# Altium PCB 6_Channels_RX_V1_PCB.PcbDoc
Units mm, origin at the board's own origin, x right, y up, seen from the top; angles counter-clockwise.
Board outline 70 x 50 mm, 2 copper layers (Top Layer, Bottom Layer); 23 components, 20 nets, 102 pads, 14 vias.
Unrouted connection lines stored in the file: 2.
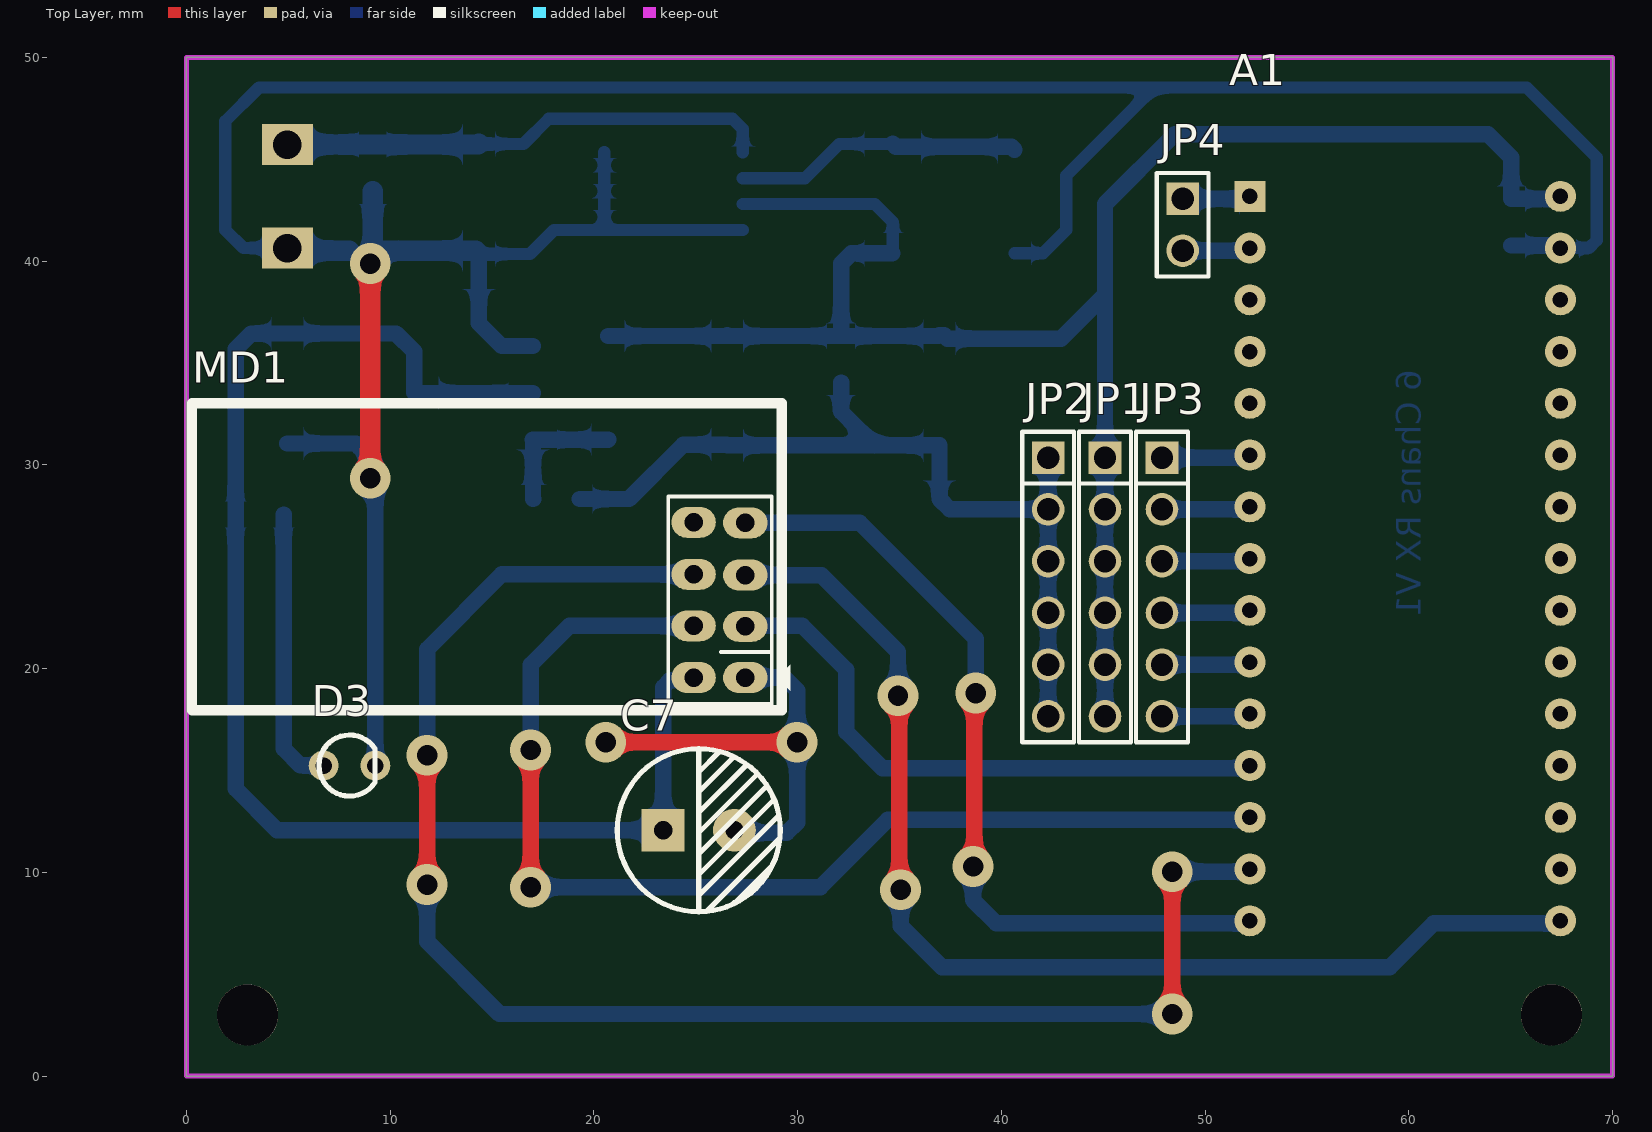
[diagram p0: Top Layer view]
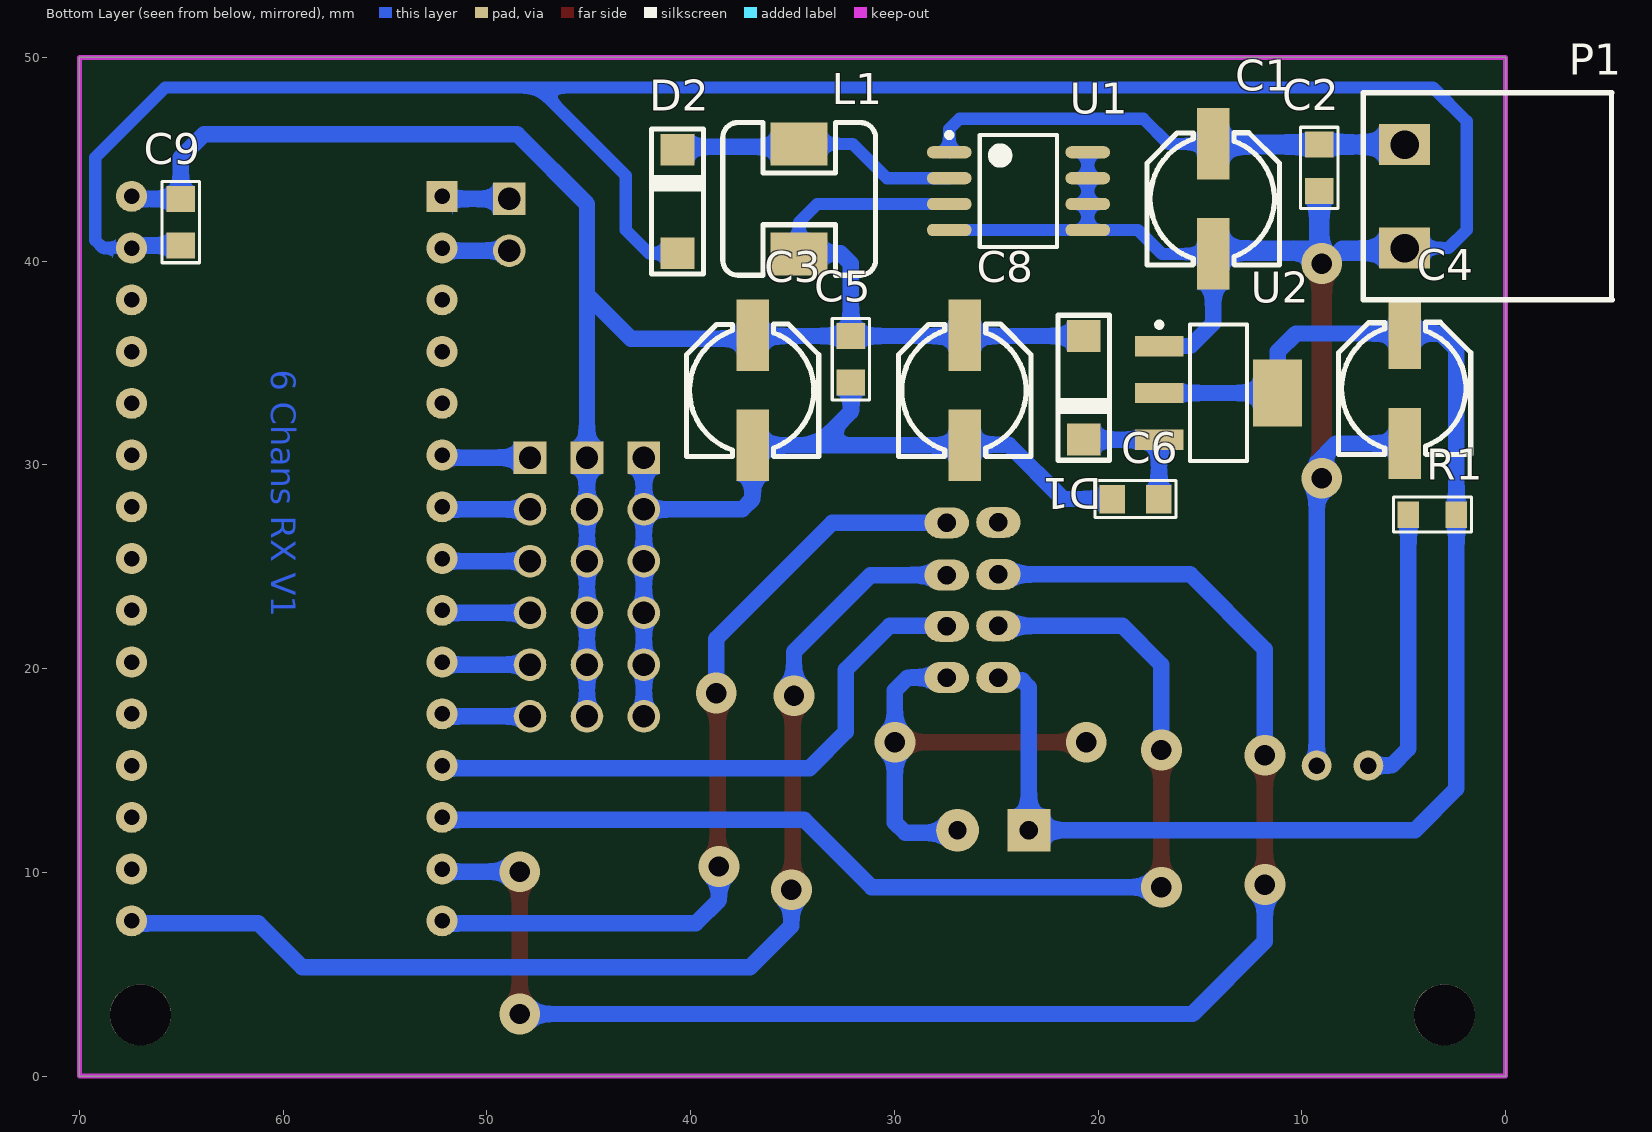
[diagram p1: Bottom Layer view, seen from below]

## Layer stack, top to bottom
Top Solder: solder mask 0.0102, Solder Resist, Dk 3.5
Top Layer: signal copper 0.0356
Dielectric 1: dielectric 0.32, FR-4, Dk 4.8
Bottom Layer: signal copper 0.0356
Bottom Solder: solder mask 0.0102, Solder Resist, Dk 3.5

## Board outline
0,0 70,0 70,50 0,50

## Design rules (kind name [scope] priority, off if disabled: settings)
Clearance [All] p1: gap=1 ignorepadtopadclearanceinfootprint=FALSE
PolygonConnect [All] p1: connectstyle=Relief reliefconductorwidth=0.254 reliefentries=4 polygonreliefangle="90 Angle" airgapwidth=0.254
RoutingVias [All] p1: holewidth=1 width=2 viastyle="Through Hole" minholewidth=1 minwidth=2 maxholewidth=1 maxwidth=2
SolderMaskExpansion [All] p1: expansion=0.102 istentingtop=FALSE
Width [All] p1: maxlimit=1 minlimit=0.6 preferedwidth=0.8
30 further rules are at their usual default settings.

## Components (designator, comment, footprint, x,y, rotation, side; value= is the part's Value field where it differs from the comment)
A1 "Nano" "Arduino nano" 50.673,47.244 r270 top
C1 "100uF/ 35V" "CAP SMD ALUMINUM D8" 14.351,43.053 r0 bottom
C2 "104" SM-0805 9.144,44.577 r90 bottom
C3 "16V/ 220uF" "CAP SMD ALUMINUM D8" 36.957,33.655 r0 bottom
C4 "16V/ 220uF" "CAP SMD ALUMINUM D8" 4.953,33.749 r0 bottom
C5 "104" SM-0805 32.131,35.179 r90 bottom
C6 "104" SM-0805 18.161,28.321 r180 bottom
C7 "10uF" "tu hoa 8mm" 25.146,12.065 r0 top
C8 "16V/ 220uF" "CAP SMD ALUMINUM D8" 26.543,33.655 r0 bottom
C9 "104" SM-0805 65.024,41.91 r90 bottom
D1 "M7" DO-214AC 20.701,33.782 r270 bottom
D2 "SS210" DO-214AC 40.64,42.926 r90 bottom
D3 "LED" "LED-3MM GRE" 8.001,15.24 r0 top value="LED 3 ly Single Colour"
JP1 "JP 1x6 2.54" "JP 1x6 DT" 45.085,30.353 r270 top
JP2 "JP 1x6 2.54" "JP 1x6 DT" 42.291,30.353 r270 top
JP3 "JP 1x6 2.54" "JP 1x6 DT" 47.879,30.353 r270 top
JP4 "JP 1x2 2.54" "JP 1x2 DT" 48.895,43.053 r270 top
L1 "100uH" "INDUCTOR SMD 7342 7.3X7.3X4.2mm" 34.671,43.053 r270 bottom value="150 mH"
MD1 "NRF24L01 Module" NRF24L01 27.432,19.558 r90 top
P1 "CON 2 EDG5.08" "CON 2 2EDG5.08" 4.953,45.72 r270 bottom
R1 "1k" "RESISTOR SMD 0805" 3.59,27.559 r0 bottom
U1 "XL1509" SOP8 23.905,43.434 r180 bottom
U2 "LM1117-3.3V" SOT223-4N 14.097,33.528 r180 bottom

## Footprints (in the part's own frame and the unit in brackets; to place one, negate y for a bottom-side part, rotate by r counter-clockwise, add the part's x,y. Pads: shape width x height; smd on the part's side, far side on the other; paste and mask are expansions set on the pad)
"Arduino nano" [mil] "arduino nano"
  rect 60x60 hole 30: 0(160,60)
  round 60 hole 30: 1(260,60) 2(360,60) 3(460,60) 4(560,60) 5(660,60) 6(760,60) 7(860,60) 8(960,60) 9(1060,60) 10(1160,60) 11(1260,60) 12(1360,60) 13(1460,60) 14(1560,60) 15(1560,660) 16(1460,660) 17(1360,660) 18(1260,660) 19(1160,660) 20(1060,660) 21(960,660) 22(860,660) 23(760,660) 24(660,660) 25(560,660) 26(460,660) 27(360,660) 28(260,660) 29(160,660)
  body extent -25,10 1715,710, height 507
"CAP SMD ALUMINUM D8" [mm] "SMT Aluminum Electrolytic Capacitors, Dimensions 6.3x7.7(DxL)"
  rect 1.6x3.5 smd: 1(0,-2.7) 2(0,2.7)
  silkscreen extent -3.25,-3.25 3.25,3.25, body extent -3.34,-3.52 3.26,3.48, height 7.7
"CON 2 2EDG5.08" [mm]
  rect 2x2.5 hole 1.4: 1(0,0) 2(5.08,0)
  silkscreen extent -2.54,-2.03 7.62,10.21, body extent -2.5,-1.75 7.58,10.25, height 3.15
DO-214AC [mm]
  rect 1.55x1.65 smd: 1(-2.54,0) 2(2.54,0)
  silkscreen extent -3.56,-1.27 3.56,1.27, body extent -2.59,-1.29 2.61,1.31, height 2.4
"INDUCTOR SMD 7342 7.3X7.3X4.2mm" [mm] "Inductor 7342 Body 7.3x7.3X4.2mm, Pad 2.8x2.1mm"
  rect 2.1x2.8 smd: 1(-2.7,0) 2(2.7,0)
  silkscreen extent -3.75,-3.75 3.75,3.75, body extent -3.65,-3.65 3.65,3.65, height 4.8
"JP 1x2 DT" [mm] "2 pins, 1 row, straight, gold plating"
  rect 1.6x1.6 hole 1.1: 1(0,0)
  round 1.6 hole 1.1: 2(2.54,0)
  silkscreen extent -1.27,-1.27 3.81,1.27, body extent -1.27,-1.27 3.81,1.27, height 8.54
"JP 1x6 DT" [mm] "6 pins, 1 row, straight, gold plating"
  rect 1.6x1.6 hole 1.1: 1(0,0)
  round 1.6 hole 1.1: 2(2.54,0) 3(5.08,0) 4(7.62,0) 5(10.16,0) 6(12.7,0)
  silkscreen extent -1.27,-1.27 13.97,1.27, body extent -1.27,-1.27 13.97,1.27, height 8.54
"LED-3MM GRE" [mm]
  round 1.47 hole 0.813: 1(-1.27,0) 2(1.27,0)
  silkscreen extent -1.5,-1.5 1.25,1.5, body extent -1.73,-1.65 1.49,1.65, height 4.72
NRF24L01 [mil]
  oval 60x86 hole 36: 1(0,0) 2(0,100) 3(99,0) 4(100,100) 5(198,0) 6(199.5,100) 7(299,0) 8(300,100)
  silkscreen extent -63,-86 530,1069, body extent -73,-74 518,1068, height 588
"RESISTOR SMD 0805" [mm]
  rect 1.05x1.3 smd: 1(-1.177,0) 2(1.177,0)
  Top Layer pour cut-out: -0.584,0.864 0.584,0.864 0.584,-0.864 -0.584,-0.864
  silkscreen extent -1.92,-0.86 1.92,0.86, body extent -1,-0.62 1,0.63, height 0.5
SM-0805 [mil] "Compoment SMD 80x50mil"
  rect 50x55 smd: 1(-45,0) 2(45,0)
  Top Layer pour cut-out: -18,36 18,36 18,-36 -18,-36
  silkscreen extent -78,-36 78,36, body extent -40,-25 40,25, height 24
SOP8 [mm] "8-Pin Small Outline Package 1.27 mm Pitch, IPC Medium Density"
  oval 2.2x0.6 smd: 1(-3.4,1.905) 2(-3.4,0.635) 3(-3.4,-0.635) 4(-3.4,-1.905) 5(3.4,-1.905) 6(3.4,-0.635) 7(3.4,0.635) 8(3.4,1.905)
  silkscreen extent -3.52,-2.75 1.9,2.88, body extent -3.02,-2.51 3.02,2.51, height 1.6
SOT223-4N [mm] "SOT223, 4-Leads, Body 6.5x3.5mm, Pitch 2.3mm, Lead Span 7mm, IPC Medium Density"
  rect 2.4x1 smd: 1(-2.9,2.3) 2(-2.9,0) 3(-2.9,-2.3)
  rect 2.4x3.3 smd: 4(2.9,0)
  silkscreen extent -3.03,-3.35 1.4,3.47, body extent -3.39,-3.27 3.5,3.23, height 1.72
"tu hoa 8mm" [mm]
  rect 2.1x2.1 hole 0.9: 1(-1.75,0)
  round 2.1 hole 0.9: 2(1.75,0)
  silkscreen extent -4,-4 4,4, body extent -4.1,-4.07 4.1,4.13, height 13.81

## Part data
A1: library part "Arduino Nano"
C1 C3 C4 C8: library part Cap_Polar
C2 C5 C6 C9: library part Cap_Non-Polar
C7: library part "Tu Hoa 100uF 35V 8x11", "Cắm", Chung_Loai=Cắm, Don_Vi=Con, Ma_Hang=MH002807, So_Chan=2, Ten_Linh_Kien="Tụ Hóa 100uF 35V 8x11MM"
D1: library part "Diode Standard", "Diode Standard", Part Number="LED 3 ly Single Colour"
D2: library part "Diode Schottky", "Diode Schottky", Part Number="LED 3 ly Single Colour"
D3: "LED Single"
JP1 JP2 JP3: library part "JP 1x6 2.54 Duc Thang", "Cắm", Chung_Loai=Cắm, Don_Vi=Con, Ma_Hang=MH000903, Ten_Linh_Kien="Jump Đơn Đực 2.54MM 1x40P Thẳng 11MM"
JP4: library part "JP 1x2 2.54 Duc Thang", "Cắm", Chung_Loai=Cắm, Don_Vi=Con, Ma_Hang=MH000903, Ten_Linh_Kien="Jump Đơn Đực 2.54MM 1x40P Thẳng 11MM"
L1: library part "Inductor Iron", "Magnetic-Core Inductor"
P1: "Cắm", Chung_Loai=Cắm, Don_Vi=Con, Ma_Hang=MH000759, Ten_Linh_Kien="CON 2 2EDG5.08-2P 5.08MM ( Xanh Cong)"
R1: library part Resistor
U1: "IC power sop8"
U2: library part LM1117, "800mA Low-Dropout Linear Regulator", Creator="Nguyen Ba Bien", Website=http://group3i.net

## Free pads (board coordinates)
  round 3 hole 3: 3(3,3) 3(67,3)

## Via types
v1: diameter 2, hole 1, Top Layer to Bottom Layer, 14 vias

## Nets (pads, with @x,y where several pads share a name; then routed paths per layer and width w, separated by ;. In a path a pad name is that pad's centre, name@x,y a point inside that pad or via, vN(x,y) a via of type N, cw(c..) or ccw(c..) an arc to the next point about the centre after c; other vN are vias at no path point)
+3.3V: C4.1 C7.1 MD1.2 R1.1 U2.2 U2.4 | length 69.4
  Bottom Layer w0.8: U2.2 U2.4 11.176,33.549 11.176,35.56 10.287,36.449 C4.1 3.175,36.449 2.413,35.687 R1.1 2.413,14.097 4.445,12.065 C7.1 23.396,19.089 23.726,19.419 24.753,19.419 MD1.2
+5V: A1.29 C3.1 C5.2 C8.1 C9.2 D1.1 JP1.1 JP1.2 JP1.3 JP1.4 JP1.5 JP1.6 L1.2 U1.3 | length 92.6
  Bottom Layer w0.6: U1.3 33.782,42.799 34.671,41.91 34.671,40.419 L1.2@34.638,40.386
  Bottom Layer w0.8: D1.1 26.51,36.322 C8.1 26.576,36.322 C5.2 ; L1.2@34.638,40.386 32.639,40.386 32.131,39.878 C5.2 ; JP1.6 JP1.5 JP1.4 JP1.3 JP1.2 JP1.1 45.085,38.354 ; A1.29@67.691,43.053 C9.2 65.024,45.085 63.881,46.228 48.514,46.228 45.085,42.799 45.085,38.354 ; C5.2 36.924,36.322 C3.1 37.197,36.355 37.357,36.195 42.926,36.195 45.085,38.354
+12V: C1.1 C2.2 P1.1 U1.1 | length 24.2
  Bottom Layer w0.6: C1.1 16.543,45.753 17.78,46.99 26.797,46.99 27.305,46.482 U1.1
  Bottom Layer w1: P1.1 C2.2 14.318,45.72 C1.1
CE: A1.11 MD1.3 | length 29.7
  Bottom Layer w0.8: MD1.3 27.457,22.098 30.226,22.098 32.385,19.939 32.385,16.891 34.163,15.113 A1.11@52.451,15.113
CH1: A1.5 JP3.1 | length 4.6
  Bottom Layer w0.8: JP3.1 A1.5@52.451,30.353
CH2: A1.6 JP3.2 | length 4.6
  Bottom Layer w0.8: JP3.2 A1.6@52.451,27.813
CH3: A1.7 JP3.3 | length 4.6
  Bottom Layer w0.8: JP3.3 A1.7@52.451,25.273
CH4: A1.8 JP3.4 | length 4.6
  Bottom Layer w0.8: JP3.4 A1.8@52.451,22.733
CH5: A1.9 JP3.5 | length 4.6
  Bottom Layer w0.8: JP3.5 A1.9@52.451,20.193
CH6: A1.10 JP3.6 | length 4.6
  Bottom Layer w0.8: JP3.6 A1.10@52.451,17.653
CSN: A1.12 MD1.4 | length 56.6
  Top Layer w0.8: v1(16.891,9.271) v1(16.891,16.002)
  Bottom Layer w0.8: v1(16.891,9.271) 31.115,9.271 34.417,12.573 A1.12@52.451,12.573 ; v1(16.891,16.002) 16.891,20.193 18.796,22.098 MD1.4
GND: A1.28 C1.2 C2.1 C3.2 C4.2 C5.1 C6.1 C7.2 C8.2 C9.1 D2.1 D3.2 JP2.1 JP2.2 JP2.3 JP2.4 JP2.5 JP2.6 MD1.1 P1.2 U1.4 U1.5 U1.6 U1.7 U1.8 U2.1 | length 229.8
  Top Layer w0.8: v1(20.574,16.383) v1(29.972,16.383)
  Top Layer w1: v1(9.017,29.337) v1(9.017,39.878)
  Bottom Layer w0.6: P1.2 2.794,40.64 1.905,41.529 1.905,46.863 3.556,48.514 47.498,48.514 ; C1.2 16.858,40.353 18.034,41.529 U1.5 ; U1.8 U1.7 U1.6 U1.5 ; U1.4 U1.5 ; D2.1 42.037,40.386 43.18,41.529 43.18,44.196 47.498,48.514 ; A1.28@67.691,40.513 67.818,40.64 68.834,40.64 69.215,41.021 69.215,45.085 65.786,48.514 47.498,48.514
  Bottom Layer w0.8: C4.2 8.321,31.049 9.271,30.099 D3.2 ; C1.2 14.351,36.957 15.48,35.828 U2.1 ; C6.1 21.717,28.321 24.384,30.988 26.51,30.988 C8.2 33.782,30.955 ; C7.2 27.023,11.938 29.464,11.938 29.972,12.446 v1(29.972,16.383) 29.972,18.923 29.337,19.558 MD1.1 ; C5.1 32.131,32.606 33.782,30.955 ; JP2.6 JP2.5 JP2.4 JP2.3 JP2.2 ; JP2.1 JP2.2 ; C9.1 67.241,40.767 67.495,40.513 A1.28@67.691,40.513 ; 33.782,30.955 C3.2 36.957,28.321 37.465,27.813 JP2.2
  Bottom Layer w1: P1.2 5.08,40.513 8.001,40.513 ; v1(9.017,39.878) 9.144,40.005 v1@9.144,40.513 ; C2.1 v1@9.144,40.513 ; C1.2 14.191,40.513 v1@9.144,40.513
MISO: A1.14 MD1.7 | length 40.9
  Top Layer w0.8: v1(38.608,10.287) 38.672,10.351 38.672,18.732 v1(38.735,18.796)
  Bottom Layer w0.8: MD1.7 33.045,27.153 38.735,21.463 v1(38.735,18.796) ; v1(38.608,10.287) 38.608,8.636 39.751,7.493 A1.14@52.451,7.493
MOSI: A1.13 MD1.6 | length 78.1
  Top Layer w0.8: v1(11.811,9.398) v1(11.811,15.748) ; v1(48.387,3.048) v1(48.387,10.033)
  Bottom Layer w0.8: v1(11.811,9.398) 11.811,6.604 15.367,3.048 v1(48.387,3.048) ; v1(11.811,15.748) 11.811,20.955 15.481,24.625 MD1.6 ; v1(48.387,10.033) A1.13@52.451,10.033
NetC6_2: C6.2 D1.2 U2.3 | length 6.6
  Bottom Layer w0.8: C6.2 17.007,28.332 17.007,31.217 U2.3 17.004,31.235 20.694,31.235 D1.2
NetD2_2: D2.2 L1.1 U1.2 | length 14.2
  Bottom Layer w0.6: U1.2 30.353,44.069 32.037,45.753 L1.1
  Bottom Layer w0.8: L1.1 34.814,45.609 40.497,45.609 D2.2
NetD3_1: D3.1 R1.2 | length 13.8
  Bottom Layer w0.8: R1.2 4.768,16.06 5.588,15.24 D3.1
RXD: A1.1 JP4.2 | length 3.6
  Bottom Layer w0.8: JP4.2 A1.1@52.451,40.513
SCK: A1.15 MD1.5 | length 56.9
  Top Layer w0.8: v1(34.925,18.669) 34.989,18.605 34.989,9.207 v1(35.052,9.144)
  Bottom Layer w0.8: MD1.5 31.166,24.587 34.925,20.828 v1(34.925,18.669) ; v1(35.052,9.144) 35.052,7.366 37.084,5.334 59.055,5.334 61.214,7.493 A1.15@67.691,7.493
TXD: A1.0 JP4.1 | length 3.6
  Bottom Layer w0.8: JP4.1 A1.0@52.451,43.053
pads on no net: A1.2 A1.3 A1.4 A1.16 A1.17 A1.18 A1.19 A1.20 A1.21 A1.22 A1.23 A1.24 A1.25 A1.26 A1.27 MD1.8

## Keep-outs
Keep-Out Layer:
  the board outline again, w0.254

## Other copper
Bottom Layer:
  pour cut-out: 30.861,46.99 38.481,46.99 38.481,39.116 30.861,39.116
  text "6 Chans RX V1" at 60.579,34.671 h1.2 r90